# Altium PCB CellVoltageControl.PcbDoc (part 3 of 3)
Units mm, origin at the board's own origin, x right, y up, seen from the top; angles counter-clockwise.
Board outline 100.01 x 50.02 mm, 2 copper layers (Top Layer, Bottom Layer); 240 components, 246 nets, 730 pads, 332 vias.
Unrouted connection lines stored in the file: 5.
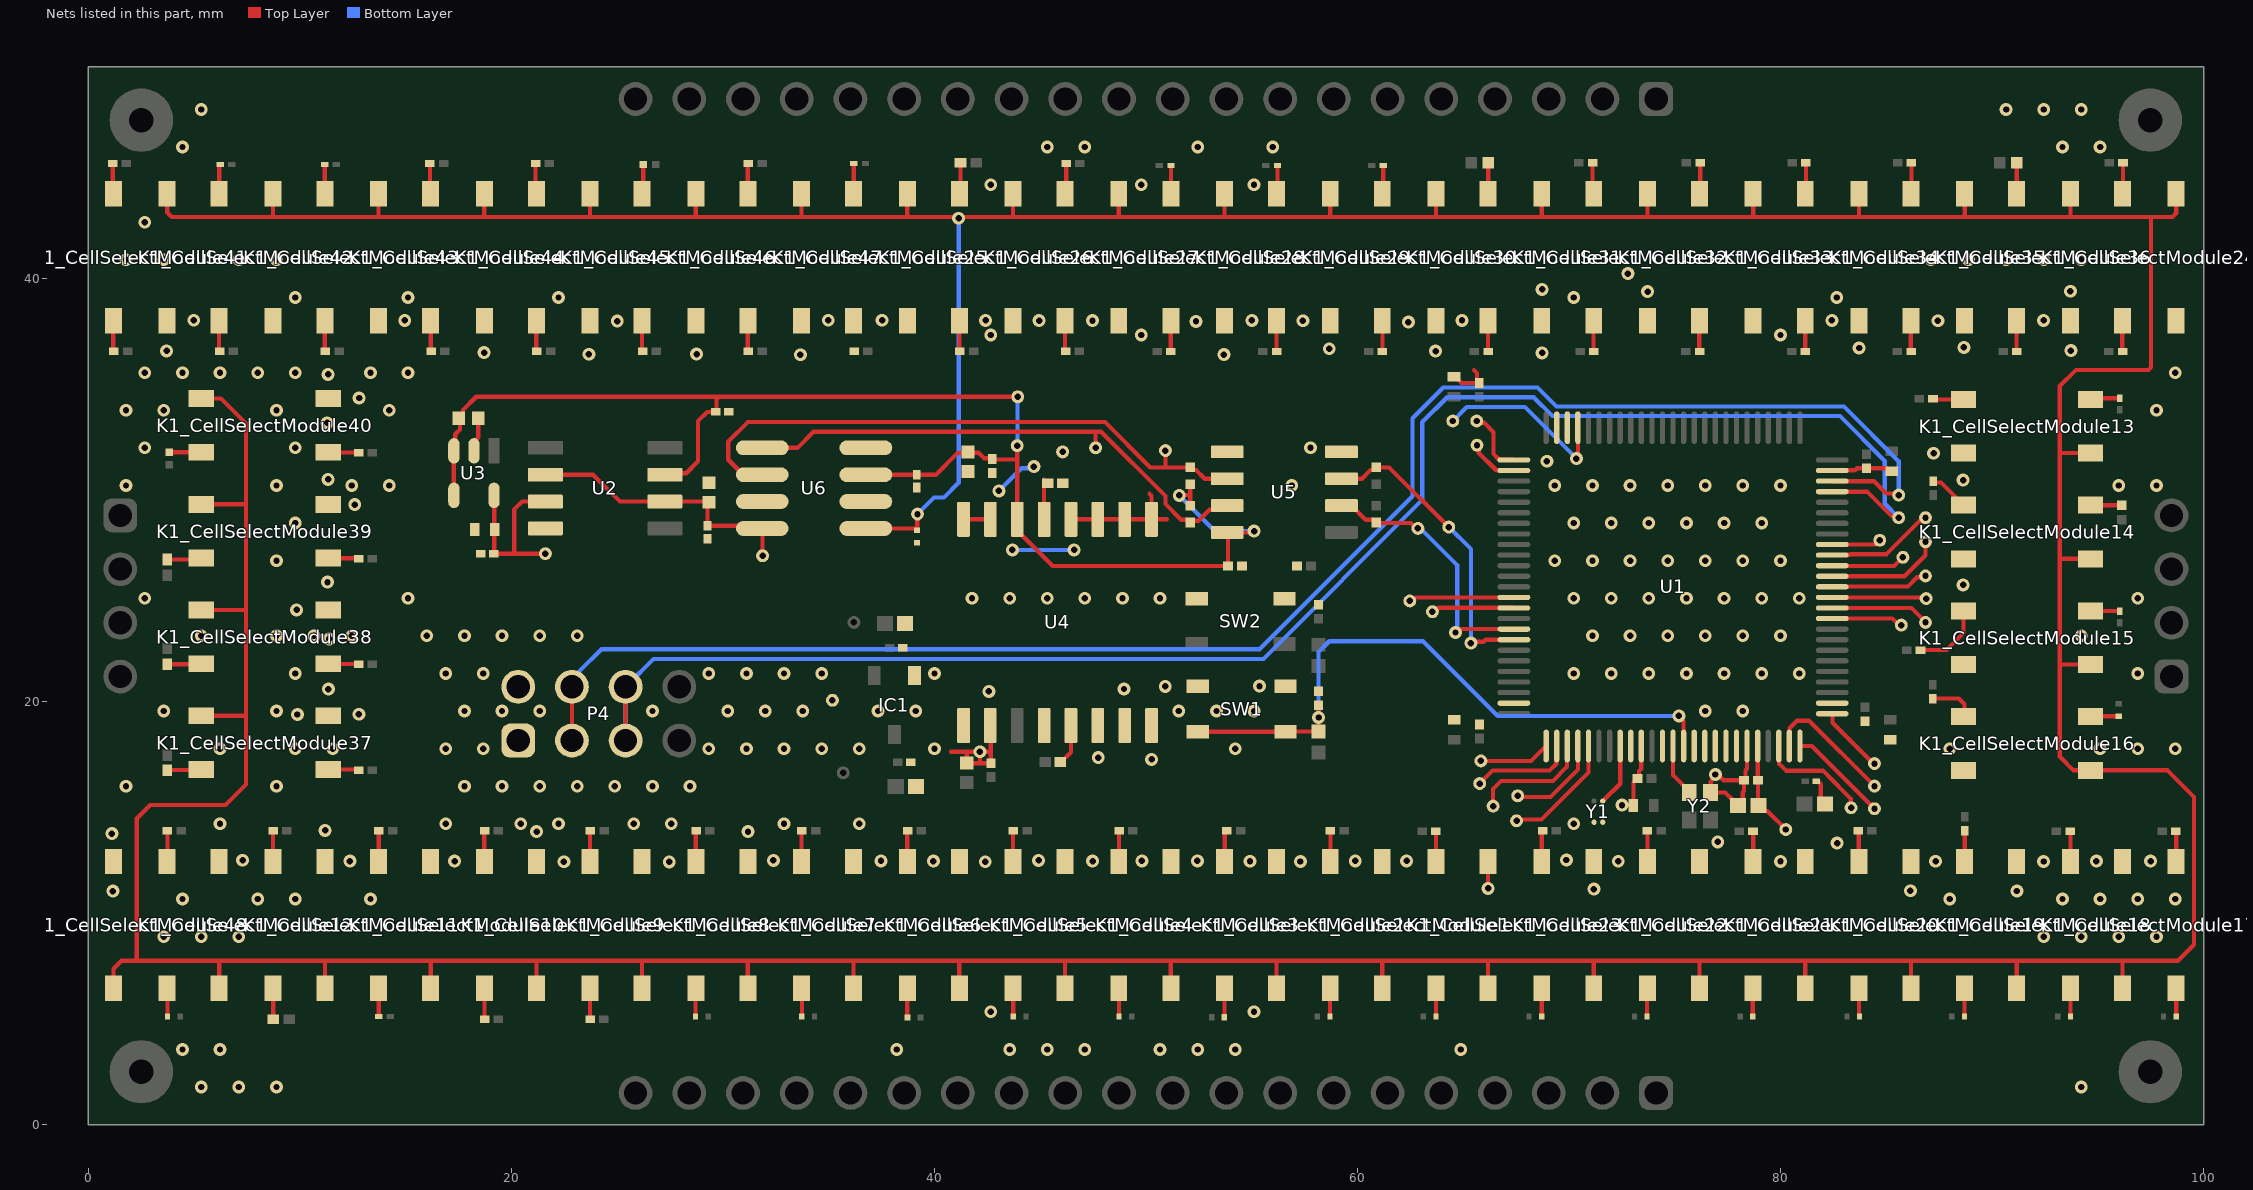
[diagram p3: the nets of this part, all layers, seen from the top]

## Via types
v1: diameter 0.6, hole 0.3, Top Layer to Bottom Layer, 207 vias
v2: diameter 0.61, hole 0.305, Top Layer to Bottom Layer, tented both sides, 125 vias

## Nets (pads, with @x,y where several pads share a name; then routed paths per layer and width w, separated by ;. In a path a pad name is that pad's centre, name@x,y a point inside that pad or via, vN(x,y) a via of type N, cw(c..) or ccw(c..) an arc to the next point about the centre after c; other vN are vias at no path point) (continued)
GND: C1.2 C2.1 C3.2 C4.1 C5.2 C6.1 C7.2 C8.1 C9.2 C10.1 C11.2 C12.2 C13.2 C14.2 C15.2 C16.2 C23.2 C24.2 C25.2 C26.2 C27.1 C28.1 C31.2 IC1.1 J38.1 K1_CellSelectModule1.2 K1_CellSelectModule2.2 K1_CellSelectModule3.2 K1_CellSelectModule4.2 K1_CellSelectModule5.2 K1_CellSelectModule6.2 K1_CellSelectModule7.2 K1_CellSelectModule8.2 K1_CellSelectModule9.2 K1_CellSelectModule10.2 K1_CellSelectModule11.2 K1_CellSelectModule12.2 K1_CellSelectModule13.2 K1_CellSelectModule14.2 K1_CellSelectModule15.2 K1_CellSelectModule16.2 K1_CellSelectModule17.2 K1_CellSelectModule18.2 K1_CellSelectModule19.2 K1_CellSelectModule20.2 K1_CellSelectModule21.2 K1_CellSelectModule22.2 K1_CellSelectModule23.2 K1_CellSelectModule24.2 K1_CellSelectModule25.2 K1_CellSelectModule26.2 K1_CellSelectModule27.2 K1_CellSelectModule28.2 K1_CellSelectModule29.2 K1_CellSelectModule30.2 K1_CellSelectModule31.2 K1_CellSelectModule32.2 K1_CellSelectModule33.2 K1_CellSelectModule34.2 K1_CellSelectModule35.2 K1_CellSelectModule36.2 K1_CellSelectModule37.2 K1_CellSelectModule38.2 K1_CellSelectModule39.2 K1_CellSelectModule40.2 K1_CellSelectModule41.2 K1_CellSelectModule42.2 K1_CellSelectModule43.2 K1_CellSelectModule44.2 K1_CellSelectModule45.2 K1_CellSelectModule46.2 K1_CellSelectModule47.2 K1_CellSelectModule48.2 P4.1 P4.2 SW1.1 SW1.2 SW2.1 SW2.2 U1.10 U1.19 U1.20 U1.27 U1.49 U1.74 U1.99 U4.2 U4.6 U4.7 U4.8 U5.4 Y1.1 Y1.4 Y2.2 | length 23.9
  Top Layer w0.2: 40.783,17.634 v2(42.152,17.634) ; 41.529,17.572 C27.1@41.529,17.097 41.532,17.094 42.102,17.094 ; v2@42.073,17.555 v2(42.152,17.634) ; U4.2@42.649,18.874 42.661,18.863 42.661,17.653 ; C2.1@64.567,35.364 64.642,35.364 64.932,35.074 C1.2@65.765,35.074 65.655,35.184 65.655,35.536 65.514,35.677 ; K1_CellSelectModule23.2@66.18,12.444 66.181,12.443 v2(66.181,11.171) ; v2(72.517,15.113) 73.037,15.113 C4.1@73.058,15.092 73.058,16.196 73.23,16.368 C3.2@73.25,16.368 73.326,16.444 73.326,16.728 73.43,16.832 U1.10@73.43,17.907 ; Y2.2@76.7,15.706 77.394,15.706 77.73,15.37 77.73,15.346 77.986,15.09 C14.2@78.01,15.09 78.228,15.309 78.228,15.721 78.283,15.775 C13.2@78.283,16.285 ; Y2.2@76.708,15.714 76.708,16.224 76.931,16.447 v2(76.931,16.558) 77.042,16.558 77.315,16.285 C13.2@78.283,16.285 ; U1.20@78.43,17.907 78.43,16.832 78.359,16.761 78.359,16.361 C13.2@78.283,16.285 ; C15.2@81.777,16.256 81.777,16.216 81.798,16.216 81.915,16.099 81.915,15.363 C16.2@82.106,15.172 ; U1.49@82.455,30.932 82.465,30.942 83.527,30.942 83.624,31.039 C7.2@84.074,31.039 85.051,31.039 85.196,30.894 C6.1@85.271,30.894 ; 42.102,17.094 C28.1@42.672,17.094 42.661,17.105 42.661,17.653 ; 42.102,17.094 42.152,17.144 v2(42.152,17.634) ; v2(42.152,17.634) 42.641,17.634 42.661,17.653
  other v1: 5.334,1.778 7.112,1.778 8.89,1.778 94.234,1.778 4.445,3.556 6.223,3.556 38.227,3.556 43.561,3.556 45.339,3.556 47.117,3.556 50.673,3.556 52.451,3.556 54.229,3.556 64.897,3.556 42.672,5.334 55.118,5.334 3.556,8.89 5.334,8.89 7.112,8.89 92.456,8.89 94.234,8.89 96.012,8.89 97.79,8.89 4.445,10.668 8.001,10.668 9.779,10.668 13.335,10.668 88.011,10.668 93.345,10.668 95.123,10.668 96.901,10.668 98.679,10.668 6.223,14.224 16.891,14.224 20.447,14.224 22.225,14.224 25.781,14.224 27.559,14.224 32.893,14.224 36.449,14.224 70.231,14.224 1.778,16.002 8.89,16.002 17.78,16.002 19.558,16.002 21.336,16.002 23.114,16.002 24.892,16.002 26.67,16.002 28.448,16.002 6.223,17.78 9.779,17.78 11.557,17.78 16.891,17.78 18.669,17.78 29.337,17.78 31.115,17.78 32.893,17.78 34.671,17.78 36.449,17.78 40.005,17.78 54.229,17.78 88.011,17.78 95.123,17.78 96.901,17.78 98.679,17.78 3.556,19.558 8.89,19.558 17.78,19.558 19.558,19.558 21.336,19.558 26.67,19.558 30.226,19.558 32.004,19.558 33.782,19.558 37.338,19.558 39.116,19.558 51.562,19.558 53.34,19.558 55.118,19.558 76.454,19.558 78.232,19.558 9.779,21.336 16.891,21.336 18.669,21.336 29.337,21.336 31.115,21.336 32.893,21.336 34.671,21.336 40.005,21.336 70.231,21.336 72.009,21.336 73.787,21.336 75.565,21.336 77.343,21.336 79.121,21.336 80.899,21.336 96.901,21.336 5.334,23.114 8.89,23.114 10.668,23.114 12.446,23.114 16.002,23.114 17.78,23.114 19.558,23.114 21.336,23.114 23.114,23.114 71.12,23.114 72.898,23.114 74.676,23.114 76.454,23.114 78.232,23.114 80.01,23.114 94.234,23.114 2.667,24.892 15.113,24.892 41.783,24.892 43.561,24.892 45.339,24.892 47.117,24.892 48.895,24.892 50.673,24.892 70.231,24.892 72.009,24.892 73.787,24.892 75.565,24.892 77.343,24.892 79.121,24.892 80.899,24.892 96.901,24.892 8.89,26.67 69.342,26.67 71.12,26.67 72.898,26.67 74.676,26.67 76.454,26.67 78.232,26.67 80.01,26.67 9.779,28.448 70.231,28.448 72.009,28.448 73.787,28.448 75.565,28.448 77.343,28.448 79.121,28.448 1.778,30.226 8.89,30.226 12.446,30.226 14.224,30.226 56.896,30.226 69.342,30.226 71.12,30.226 72.898,30.226 74.676,30.226 76.454,30.226 78.232,30.226 80.01,30.226 96.012,30.226 97.79,30.226 2.667,32.004 9.779,32.004 57.785,32.004 1.778,33.782 3.556,33.782 8.89,33.782 14.224,33.782 97.79,33.782 2.667,35.56 4.445,35.56 6.223,35.56 8.001,35.56 9.779,35.56 13.335,35.56 15.113,35.56 98.679,35.56 42.672,37.338 49.784,37.338 80.01,37.338 9.779,39.116 15.113,39.116 22.225,39.116 70.231,39.116 82.677,39.116 1.778,40.894 3.556,40.894 7.112,40.894 8.89,40.894 87.122,40.894 88.9,40.894 90.678,40.894 92.456,40.894 94.234,40.894 2.667,42.672 42.672,44.45 49.784,44.45 55.118,44.45 4.445,46.228 45.339,46.228 47.117,46.228 52.451,46.228 56.007,46.228 93.345,46.228 95.123,46.228 5.334,48.006 90.678,48.006 92.456,48.006 94.234,48.006
  other v2: 1.151,11.04 86.152,11.06 91.186,11.049 71.189,11.141 22.484,12.433 27.462,12.423 42.404,12.433 54.924,12.453 57.307,12.443 72.34,12.453 80.01,12.446 87.343,12.453 92.452,12.443 12.358,12.464 17.315,12.464 37.477,12.474 39.951,12.464 47.483,12.464 49.815,12.474 52.44,12.474 59.901,12.474 62.335,12.474 94.946,12.464 97.511,12.464 7.289,12.504 32.389,12.494 44.929,12.494 69.887,12.514 82.684,13.31 77.045,13.371 1.11,13.766 21.192,13.857 31.187,13.857 11.186,13.917 50.269,17.271 47.748,17.355 9.881,19.396 12.786,19.406 42.579,20.485 11.344,20.595 48.967,20.601 50.919,20.727 55.375,20.737 11.386,22.974 9.839,24.342 88.646,25.527 11.303,25.654 12.592,29.32 88.646,30.48 11.334,30.509 68.961,31.369 87.249,31.75 11.281,33.182 12.797,34.361 11.334,35.477 33.667,36.408 23.659,36.429 53.693,36.411 28.755,36.439 18.706,36.51 68.734,36.494 63.703,36.578 3.695,36.592 93.74,36.599 58.672,36.692 83.728,36.725 88.681,36.756 62.414,37.95 52.373,37.981 25.004,37.998 14.956,38.029 42.425,38.033 44.951,38.023 47.477,38.023 55.013,38.033 57.425,38.012 64.951,38.033 82.44,38.034 87.449,38.014 92.456,38.031 4.979,38.039 34.982,38.039 37.529,38.039 73.728,39.393 93.723,39.411 68.734,39.499 72.794,40.24
HSE: U1.13 Y2.3 | length 2.5
  Top Layer w0.2: U1.13@74.93,17.907 74.93,16.526 75.7,15.756 Y2.3@75.7,15.706
ISO_5V: C17.1 C18.1 C29.1 C30.1 C32.1 C33.1 J35.1 J43.1 R56.1 R58.1 U2.7 U3.3 U3.4 U4.14 U5.8 U6.3 | length 69.6
  Top Layer w0.2: U3.4@17.278,29.758 U3.3@17.278,31.859 17.342,31.923 17.342,32.645 17.575,32.878 17.575,33.401 17.711,33.537 17.711,33.792 18.337,34.417 29.822,34.417 ; U2.7@27.256,30.734 27.327,30.804 28.264,30.804 28.829,31.369 28.829,33.274 29.258,33.703 29.661,33.703 29.695,33.737 29.695,34.29 29.822,34.417 ; U6.3@36.76,30.734 40.069,30.734 41.1,31.765 41.552,31.765 C30.1@41.593,31.806 41.627,31.773 42.086,31.773 42.343,31.515 42.697,31.515 42.754,31.459 43.914,31.459 ; J35.1@43.914,32.107 43.914,30.007 43.919,30.001 U4.14@43.919,28.624 43.919,28.099 45.599,26.42 C32.1@53.882,26.42 53.882,27.971 U5.8@53.849,28.004 55.055,28.004 v2(55.118,28.067) ; J43.1@43.942,34.417 29.822,34.417 ; v2(51.581,29.759) 51.599,29.776 52.104,29.776 ; R56.1@52.104,29.274 52.104,29.776 ; R58.1@52.104,30.278 52.104,29.776
  Bottom Layer w0.2: J35.1@43.914,32.107 43.928,32.121 43.928,34.403 J43.1@43.942,34.417 ; v2(51.581,29.759) 51.581,29.743 53.257,28.067 v2(55.118,28.067)
ISO_GND: C17.2 C18.2 C19.1 C20.1 C21.2 C22.2 C29.2 C30.2 C32.2 C33.2 J39.1 R50.1 R53.2 U2.4 U3.2 U4.9 U4.10 U4.11 U4.12 U4.15 U4.16 U5.5 U6.7 | length 13.7
  Top Layer w0.2: U3.2@18.228,31.859 18.228,32.286 18.431,32.489 C18.2@18.431,33.401 ; U4.16@41.379,28.624 U4.15@42.649,28.624 ; U4.12@46.459,28.624 U4.11@47.729,28.624 U4.10@48.999,28.624 U4.9@50.269,28.624 ; 50.175,29.828 50.269,29.733 U4.9@50.269,28.624 ; 51.006,28.624 U4.9@50.269,28.624
  Bottom Layer w0.2: v2(43.053,29.972) 44.118,31.037 44.626,31.037 v2(44.704,31.115) ; v2(43.688,27.178) v2(46.609,27.178)
ISO_SCL: J24.1 R58.2 U5.6 U6.6 | length 28.6
  Top Layer w0.2: U6.6@31.86,30.734 30.96,30.734 30.256,31.438 30.256,32.296 31.18,33.22 48.067,33.22 50.209,31.078 50.927,31.078 ; J24.1@50.927,31.877 50.927,31.078 ; U5.6@53.849,30.544 52.789,30.544 52.379,30.953 52.229,30.953 R58.2@52.104,31.078 50.927,31.078
ISO_SDA: J21.1 R56.2 U5.7 U6.5 | length 25.4
  Top Layer w0.2: U6.5@31.86,32.004 33.528,32.004 34.29,32.766 47.625,32.766 ; J21.1@47.625,32.004 47.625,32.766 ; U5.7@53.849,29.274 53.649,29.074 53.008,29.074 52.493,28.559 52.189,28.559 R56.2@52.104,28.474 51.979,28.599 51.673,28.599 50.923,29.348 50.923,29.722 47.879,32.766 47.625,32.766
LSE_RTC: U1.8 Y1.2 | length 2.8
  Top Layer w0.2: Y1.2@71.694,15.384 72.43,16.12 U1.8@72.43,17.907
NetC19_2: C19.2 C21.1 J44.1 U2.3 U3.5 | length 8.9
  Top Layer w0.2: U3.5@19.178,29.758 19.193,29.743 19.193,28.158 C19.2@19.208,28.143 19.186,28.121 19.186,27.021 C21.1@19.165,27 19.431,27 19.698,27 20.13,27 ; J44.1@21.606,27 20.13,27 ; U2.3@21.606,29.464 20.511,29.464 20.13,29.083 20.13,27
NetC20_2: C20.2 C22.1 J42.1 U2.2 U2.6 U6.8 | length 13
  Top Layer w0.2: U2.2@21.858,30.734 23.862,30.734 25.132,29.464 U2.6@27.256,29.464 29.309,29.464 C20.2@29.346,29.427 29.274,29.356 C22.1@29.274,28.321 30.698,28.321 30.825,28.194 U6.8@31.86,28.194 31.877,28.177 J42.1@31.877,27
NetK1_CellSelectModule1_1: K1_CellSelectModule1.1 R1_CellSelectModule1.2 | length 1.4
  Top Layer w0.2: K1_CellSelectModule1.1@63.714,12.439 R1_CellSelectModule1.2@63.714,13.887
NetK1_CellSelectModule1_4: K1_CellSelectModule1.4 R3.1 | length 1.3
  Top Layer w0.2: R3.1@63.718,5.111 63.718,6.442 K1_CellSelectModule1.4@63.72,6.444
NetK1_CellSelectModule2_1: K1_CellSelectModule2.1 R1_CellSelectModule2.2 | length 1.4
  Top Layer w0.2: K1_CellSelectModule2.1@58.726,12.45 R1_CellSelectModule2.2@58.726,13.899
NetK1_CellSelectModule2_4: K1_CellSelectModule2.4 R46.1 | length 1.3
  Top Layer w0.2: R46.1@58.712,5.111 58.712,6.436 K1_CellSelectModule2.4@58.72,6.444
NetK1_CellSelectModule3_1: K1_CellSelectModule3.1 R1_CellSelectModule3.2 | length 1.4
  Top Layer w0.2: K1_CellSelectModule3.1@53.726,12.45 R1_CellSelectModule3.2@53.726,13.899
NetK1_CellSelectModule3_4: K1_CellSelectModule3.4 R42.1 | length 1.3
  Top Layer w0.2: R42.1@53.72,5.152 K1_CellSelectModule3.4@53.72,6.444
NetK1_CellSelectModule4_1: K1_CellSelectModule4.1 R1_CellSelectModule4.2 | length 1.4
  Top Layer w0.2: K1_CellSelectModule4.1@48.726,12.45 R1_CellSelectModule4.2@48.726,13.899
NetK1_CellSelectModule4_4: K1_CellSelectModule4.4 R38.1 | length 1.3
  Top Layer w0.2: K1_CellSelectModule4.4@48.72,6.444 48.735,6.429 R38.1@48.735,5.111
NetK1_CellSelectModule5_1: K1_CellSelectModule5.1 R1_CellSelectModule5.2 | length 1.4
  Top Layer w0.2: K1_CellSelectModule5.1@43.72,12.444 R1_CellSelectModule5.2@43.72,13.893
NetK1_CellSelectModule5_4: K1_CellSelectModule5.4 R34.1 | length 1.3
  Top Layer w0.2: K1_CellSelectModule5.4@43.72,6.444 43.735,6.429 R34.1@43.735,5.111
NetK1_CellSelectModule6_1: K1_CellSelectModule6.1 R1_CellSelectModule6.2 | length 1.4
  Top Layer w0.2: K1_CellSelectModule6.1@38.72,12.444 R1_CellSelectModule6.2@38.72,13.893
NetK1_CellSelectModule6_4: K1_CellSelectModule6.4 R30.1 | length 1.4
  Top Layer w0.2: K1_CellSelectModule6.4@38.72,6.444 38.722,6.442 R30.1@38.722,5.065
NetK1_CellSelectModule7_1: K1_CellSelectModule7.1 R1_CellSelectModule7.2 | length 1.4
  Top Layer w0.2: K1_CellSelectModule7.1@33.72,12.444 R1_CellSelectModule7.2@33.72,13.893
NetK1_CellSelectModule7_4: K1_CellSelectModule7.4 R26.1 | length 1.3
  Top Layer w0.2: K1_CellSelectModule7.4@33.72,6.444 33.735,6.429 R26.1@33.735,5.111
NetK1_CellSelectModule8_1: K1_CellSelectModule8.1 R1_CellSelectModule8.2 | length 1.4
  Top Layer w0.2: K1_CellSelectModule8.1@28.72,12.444 R1_CellSelectModule8.2@28.72,13.893
NetK1_CellSelectModule8_4: K1_CellSelectModule8.4 R22.1 | length 1.3
  Top Layer w0.2: R22.1@28.702,5.111 28.702,6.426 K1_CellSelectModule8.4@28.72,6.444
NetK1_CellSelectModule9_1: K1_CellSelectModule9.1 R1_CellSelectModule9.2 | length 1.4
  Top Layer w0.2: K1_CellSelectModule9.1@23.72,12.444 R1_CellSelectModule9.2@23.72,13.893
NetK1_CellSelectModule9_4: K1_CellSelectModule9.4 R18.1 | length 1.5
  Top Layer w0.2: K1_CellSelectModule9.4@23.72,6.444 23.722,6.442 R18.1@23.722,4.984
NetK1_CellSelectModule10_1: K1_CellSelectModule10.1 R1_CellSelectModule10.2 | length 1.4
  Top Layer w0.2: K1_CellSelectModule10.1@18.72,12.444 R1_CellSelectModule10.2@18.72,13.893
NetK1_CellSelectModule10_4: K1_CellSelectModule10.4 R14.1 | length 1.5
  Top Layer w0.2: K1_CellSelectModule10.4@18.72,6.444 18.732,6.433 R14.1@18.732,4.984
NetK1_CellSelectModule11_1: K1_CellSelectModule11.1 R1_CellSelectModule11.2 | length 1.5
  Top Layer w0.2: K1_CellSelectModule11.1@13.72,12.444 13.732,12.456 R1_CellSelectModule11.2@13.732,13.905
NetK1_CellSelectModule11_4: K1_CellSelectModule11.4 R10.1 | length 1.3
  Top Layer w0.2: K1_CellSelectModule11.4@13.72,6.444 13.729,6.435 R10.1@13.729,5.111
NetK1_CellSelectModule12_1: K1_CellSelectModule12.1 R1_CellSelectModule12.2 | length 1.5
  Top Layer w0.2: K1_CellSelectModule12.1@8.72,12.444 8.732,12.456 R1_CellSelectModule12.2@8.732,13.905
NetK1_CellSelectModule12_4: K1_CellSelectModule12.4 R6.1 | length 1.5
  Top Layer w0.2: K1_CellSelectModule12.4@8.72,6.444 8.738,6.426 R6.1@8.738,4.984
NetK1_CellSelectModule13_1: K1_CellSelectModule13.1 R1_CellSelectModule13.2 | length 1.4
  Top Layer w0.2: R1_CellSelectModule13.2@87.225,34.289 K1_CellSelectModule13.1@88.673,34.289
NetK1_CellSelectModule13_4: K1_CellSelectModule13.4 R47.1 | length 1.4
  Top Layer w0.2: K1_CellSelectModule13.4@94.667,34.295 94.721,34.348 R47.1@96.059,34.348
NetK1_CellSelectModule14_1: K1_CellSelectModule14.1 R1_CellSelectModule14.2 | length 1.9
  Top Layer w0.2: R1_CellSelectModule14.2@87.238,30.424 87.296,30.366 87.596,30.366 K1_CellSelectModule14.1@88.667,29.295
NetK1_CellSelectModule14_4: K1_CellSelectModule14.4 R43.1 | length 1.5
  Top Layer w0.2: K1_CellSelectModule14.4@94.667,29.295 K1_CellSelectModule14.4@94.667,29.295 R43.1@96.159,29.294
NetK1_CellSelectModule15_1: K1_CellSelectModule15.1 R1_CellSelectModule15.2 | length 3.4
  Top Layer w0.2: R1_CellSelectModule15.2@86.622,22.446 87.858,22.446 88.667,23.255 K1_CellSelectModule15.1@88.667,24.295
NetK1_CellSelectModule15_4: K1_CellSelectModule15.4 R39.1 | length 1.3
  Top Layer w0.2: K1_CellSelectModule15.4@94.667,24.295 94.67,24.292 R39.1@96.013,24.292
NetK1_CellSelectModule16_1: K1_CellSelectModule16.1 R1_CellSelectModule16.2 | length 2.2
  Top Layer w0.2: R1_CellSelectModule16.2@87.207,20.148 88.437,20.148 88.708,19.877 88.708,19.335 K1_CellSelectModule16.1@88.667,19.295
NetK1_CellSelectModule16_4: K1_CellSelectModule16.4 R35.1 | length 1.4
  Top Layer w0.2: K1_CellSelectModule16.4@94.667,19.295 94.682,19.31 R35.1@96.013,19.31
NetK1_CellSelectModule17_1: K1_CellSelectModule17.1 R1_CellSelectModule17.2 | length 1.4
  Top Layer w0.2: K1_CellSelectModule17.1@98.726,12.45 R1_CellSelectModule17.2@98.726,13.899
NetK1_CellSelectModule17_4: K1_CellSelectModule17.4 R31.1 | length 1.3
  Top Layer w0.2: K1_CellSelectModule17.4@98.72,6.444 98.724,6.44 R31.1@98.724,5.111
NetK1_CellSelectModule18_1: K1_CellSelectModule18.1 R1_CellSelectModule18.2 | length 1.4
  Top Layer w0.2: K1_CellSelectModule18.1@93.726,12.45 R1_CellSelectModule18.2@93.726,13.899
NetK1_CellSelectModule18_4: K1_CellSelectModule18.4 R27.1 | length 1.3
  Top Layer w0.2: K1_CellSelectModule18.4@93.72,6.444 93.724,6.44 R27.1@93.724,5.111
NetK1_CellSelectModule19_1: K1_CellSelectModule19.1 R1_CellSelectModule19.2 | length 1.4
  Top Layer w0.2: K1_CellSelectModule19.1@88.726,12.45 R1_CellSelectModule19.2@88.726,13.899
NetK1_CellSelectModule19_4: K1_CellSelectModule19.4 R23.1 | length 1.3
  Top Layer w0.2: R23.1@88.714,5.111 88.714,6.438 K1_CellSelectModule19.4@88.72,6.444
NetK1_CellSelectModule20_1: K1_CellSelectModule20.1 R1_CellSelectModule20.2 | length 1.4
  Top Layer w0.2: K1_CellSelectModule20.1@83.714,12.439 R1_CellSelectModule20.2@83.714,13.887
NetK1_CellSelectModule20_4: K1_CellSelectModule20.4 R19.1 | length 1.3
  Top Layer w0.2: K1_CellSelectModule20.4@83.72,6.444 83.72,5.167 83.751,5.136 R19.1@83.75,5.111
NetK1_CellSelectModule21_1: K1_CellSelectModule21.1 R1_CellSelectModule21.2 | length 1.4
  Top Layer w0.2: K1_CellSelectModule21.1@78.726,12.45 R1_CellSelectModule21.2@78.726,13.899
NetK1_CellSelectModule21_4: K1_CellSelectModule21.4 R15.1 | length 1.3
  Top Layer w0.2: R15.1@78.702,5.111 78.702,6.426 K1_CellSelectModule21.4@78.72,6.444
NetK1_CellSelectModule22_1: K1_CellSelectModule22.1 R1_CellSelectModule22.2 | length 1.4
  Top Layer w0.2: K1_CellSelectModule22.1@73.726,12.45 R1_CellSelectModule22.2@73.726,13.899
NetK1_CellSelectModule22_4: K1_CellSelectModule22.4 R11.1 | length 1.3
  Top Layer w0.2: R11.1@73.703,5.111 73.703,6.427 K1_CellSelectModule22.4@73.72,6.444
NetK1_CellSelectModule23_1: K1_CellSelectModule23.1 R1_CellSelectModule23.2 | length 1.4
  Top Layer w0.2: K1_CellSelectModule23.1@68.726,12.45 R1_CellSelectModule23.2@68.726,13.899
NetK1_CellSelectModule23_4: K1_CellSelectModule23.4 R7.1 | length 1.3
  Top Layer w0.2: K1_CellSelectModule23.4@68.72,6.444 68.723,6.442 R7.1@68.723,5.111
NetK1_CellSelectModule24_1: K1_CellSelectModule24.1 R1_CellSelectModule24.2 | length 1.4
  Top Layer w0.2: R1_CellSelectModule24.2@96.174,36.567 K1_CellSelectModule24.1@96.174,38.015
NetK1_CellSelectModule24_4: K1_CellSelectModule24.4 R4.1 | length 1.5
  Top Layer w0.2: K1_CellSelectModule24.4@96.18,44.021 96.207,44.048 R4.1@96.207,45.481
NetK1_CellSelectModule25_1: K1_CellSelectModule25.1 R1_CellSelectModule25.2
NetK1_CellSelectModule25_4: K1_CellSelectModule25.4 R5.1 | length 1.4
  Top Layer w0.2: K1_CellSelectModule25.4@36.18,44.021 36.191,44.032 R5.1@36.191,45.446
NetK1_CellSelectModule26_1: K1_CellSelectModule26.1 R1_CellSelectModule26.2 | length 1.4
  Top Layer w0.2: R1_CellSelectModule26.2@41.186,36.578 K1_CellSelectModule26.1@41.186,38.027
NetK1_CellSelectModule26_4: K1_CellSelectModule26.4 R48.1 | length 1.5
  Top Layer w0.2: K1_CellSelectModule26.4@41.18,44.021 41.234,44.075 R48.1@41.234,45.481
NetK1_CellSelectModule27_1: K1_CellSelectModule27.1 R1_CellSelectModule27.2 | length 1.4
  Top Layer w0.2: R1_CellSelectModule27.2@46.174,36.567 K1_CellSelectModule27.1@46.174,38.015
NetK1_CellSelectModule27_4: K1_CellSelectModule27.4 R44.1 | length 1.5
  Top Layer w0.2: K1_CellSelectModule27.4@46.18,44.021 46.233,44.074 R44.1@46.233,45.45
NetK1_CellSelectModule28_1: K1_CellSelectModule28.1 R1_CellSelectModule28.2 | length 1.4
  Top Layer w0.2: R1_CellSelectModule28.2@51.174,36.567 K1_CellSelectModule28.1@51.174,38.015
NetK1_CellSelectModule28_4: K1_CellSelectModule28.4 R40.1 | length 1.3
  Top Layer w0.2: K1_CellSelectModule28.4@51.18,44.021 51.189,44.03 R40.1@51.189,45.354
NetK1_CellSelectModule29_1: K1_CellSelectModule29.1 R1_CellSelectModule29.2 | length 1.4
  Top Layer w0.2: R1_CellSelectModule29.2@56.174,36.567 K1_CellSelectModule29.1@56.174,38.015
NetK1_CellSelectModule29_4: K1_CellSelectModule29.4 R36.1 | length 1.4
  Top Layer w0.2: K1_CellSelectModule29.4@56.18,44.021 56.225,44.066 R36.1@56.225,45.354
NetK1_CellSelectModule30_1: K1_CellSelectModule30.1 R1_CellSelectModule30.2 | length 1.4
  Top Layer w0.2: R1_CellSelectModule30.2@61.186,36.578 K1_CellSelectModule30.1@61.186,38.027
NetK1_CellSelectModule30_4: K1_CellSelectModule30.4 R32.1 | length 1.4
  Top Layer w0.2: K1_CellSelectModule30.4@61.18,44.021 61.225,44.066 R32.1@61.225,45.354
NetK1_CellSelectModule31_1: K1_CellSelectModule31.1 R1_CellSelectModule31.2 | length 1.4
  Top Layer w0.2: R1_CellSelectModule31.2@66.174,36.567 K1_CellSelectModule31.1@66.174,38.015
NetK1_CellSelectModule31_4: K1_CellSelectModule31.4 R28.1 | length 1.5
  Top Layer w0.2: K1_CellSelectModule31.4@66.18,44.021 66.187,44.028 R28.1@66.187,45.481
NetK1_CellSelectModule32_1: K1_CellSelectModule32.1 R1_CellSelectModule32.2 | length 1.4
  Top Layer w0.2: R1_CellSelectModule32.2@71.174,36.567 K1_CellSelectModule32.1@71.174,38.015
NetK1_CellSelectModule32_4: K1_CellSelectModule32.4 R24.1 | length 1.5
  Top Layer w0.2: R24.1@71.125,45.481 71.125,44.076 K1_CellSelectModule32.4@71.18,44.021
NetK1_CellSelectModule33_1: K1_CellSelectModule33.1 R1_CellSelectModule33.2 | length 1.4
  Top Layer w0.2: R1_CellSelectModule33.2@76.174,36.567 K1_CellSelectModule33.1@76.174,38.015
NetK1_CellSelectModule33_4: K1_CellSelectModule33.4 R20.1 | length 1.5
  Top Layer w0.2: K1_CellSelectModule33.4@76.18,44.021 76.214,44.055 R20.1@76.213,45.481
NetK1_CellSelectModule34_1: K1_CellSelectModule34.1 R1_CellSelectModule34.2 | length 1.4
  Top Layer w0.2: R1_CellSelectModule34.2@81.186,36.578 K1_CellSelectModule34.1@81.186,38.027
NetK1_CellSelectModule34_4: K1_CellSelectModule34.4 R16.1 | length 1.5
  Top Layer w0.2: K1_CellSelectModule34.4@81.18,44.021 81.215,44.056 R16.1@81.215,45.481
NetK1_CellSelectModule35_1: K1_CellSelectModule35.1 R1_CellSelectModule35.2 | length 1.4
  Top Layer w0.2: R1_CellSelectModule35.2@86.174,36.567 K1_CellSelectModule35.1@86.174,38.015
NetK1_CellSelectModule35_4: K1_CellSelectModule35.4 R12.1 | length 1.5
  Top Layer w0.2: K1_CellSelectModule35.4@86.18,44.021 86.204,44.045 R12.1@86.204,45.481
NetK1_CellSelectModule36_1: K1_CellSelectModule36.1 R1_CellSelectModule36.2 | length 1.4
  Top Layer w0.2: R1_CellSelectModule36.2@91.174,36.567 K1_CellSelectModule36.1@91.174,38.015
NetK1_CellSelectModule36_4: K1_CellSelectModule36.4 R8.1 | length 1.5
  Top Layer w0.2: K1_CellSelectModule36.4@91.18,44.021 91.187,44.028 R8.1@91.187,45.481
NetK1_CellSelectModule37_1: K1_CellSelectModule37.1 R1_CellSelectModule37.2 | length 1.4
  Top Layer w0.2: K1_CellSelectModule37.1@11.329,16.8 R1_CellSelectModule37.2@12.777,16.8
NetK1_CellSelectModule37_4: K1_CellSelectModule37.4 R49.1 | length 1.6
  Top Layer w0.2: R49.1@3.73,16.764 5.305,16.764 K1_CellSelectModule37.4@5.335,16.794
NetK1_CellSelectModule38_1: K1_CellSelectModule38.1 R1_CellSelectModule38.2 | length 1.4
  Top Layer w0.2: K1_CellSelectModule38.1@11.34,21.788 R1_CellSelectModule38.2@12.789,21.788
NetK1_CellSelectModule38_4: K1_CellSelectModule38.4 R45.1 | length 1.6
  Top Layer w0.2: R45.1@3.73,21.77 5.311,21.77 K1_CellSelectModule38.4@5.335,21.794
NetK1_CellSelectModule39_1: K1_CellSelectModule39.1 R1_CellSelectModule39.2 | length 1.4
  Top Layer w0.2: K1_CellSelectModule39.1@11.34,26.788 R1_CellSelectModule39.2@12.789,26.788
NetK1_CellSelectModule39_4: K1_CellSelectModule39.4 R41.1 | length 1.6
  Top Layer w0.2: R41.1@3.73,26.727 5.268,26.727 K1_CellSelectModule39.4@5.335,26.794
NetK1_CellSelectModule40_1: K1_CellSelectModule40.1 R1_CellSelectModule40.2 | length 1.4
  Top Layer w0.2: K1_CellSelectModule40.1@11.34,31.788 R1_CellSelectModule40.2@12.789,31.788
NetK1_CellSelectModule40_4: K1_CellSelectModule40.4 R37.1 | length 1.5
  Top Layer w0.2: R37.1@3.811,31.796 4.145,31.796 4.147,31.794 K1_CellSelectModule40.4@5.335,31.794
NetK1_CellSelectModule41_1: K1_CellSelectModule41.1 R1_CellSelectModule41.2 | length 1.4
  Top Layer w0.2: R1_CellSelectModule41.2@1.174,36.567 K1_CellSelectModule41.1@1.174,38.015
NetK1_CellSelectModule41_4: K1_CellSelectModule41.4 R33.1 | length 1.4
  Top Layer w0.2: R33.1@1.143,45.45 1.143,44.058 K1_CellSelectModule41.4@1.18,44.021
NetK1_CellSelectModule42_1: K1_CellSelectModule42.1 R1_CellSelectModule42.2 | length 1.4
  Top Layer w0.2: R1_CellSelectModule42.2@6.174,36.567 K1_CellSelectModule42.1@6.174,38.015
NetK1_CellSelectModule42_4: K1_CellSelectModule42.4 R29.1 | length 1.4
  Top Layer w0.2: K1_CellSelectModule42.4@6.18,44.021 6.18,45.375 6.205,45.4 R29.1@6.223,45.4
NetK1_CellSelectModule43_1: K1_CellSelectModule43.1 R1_CellSelectModule43.2 | length 1.4
  Top Layer w0.2: R1_CellSelectModule43.2@11.174,36.567 K1_CellSelectModule43.1@11.174,38.015
NetK1_CellSelectModule43_4: K1_CellSelectModule43.4 R25.1 | length 1.4
  Top Layer w0.2: R25.1@11.176,45.4 11.176,44.025 K1_CellSelectModule43.4@11.18,44.021
NetK1_CellSelectModule44_1: K1_CellSelectModule44.1 R1_CellSelectModule44.2 | length 1.4
  Top Layer w0.2: R1_CellSelectModule44.2@16.186,36.578 K1_CellSelectModule44.1@16.186,38.027
NetK1_CellSelectModule44_4: K1_CellSelectModule44.4 R21.1 | length 1.4
  Top Layer w0.2: R21.1@16.144,45.45 16.144,44.057 K1_CellSelectModule44.4@16.18,44.021
NetK1_CellSelectModule45_1: K1_CellSelectModule45.1 R1_CellSelectModule45.2 | length 1.4
  Top Layer w0.2: R1_CellSelectModule45.2@21.174,36.567 K1_CellSelectModule45.1@21.174,38.015
NetK1_CellSelectModule45_4: K1_CellSelectModule45.4 R17.1 | length 1.4
  Top Layer w0.2: R17.1@21.144,45.45 21.144,44.057 K1_CellSelectModule45.4@21.18,44.021
NetK1_CellSelectModule46_1: K1_CellSelectModule46.1 R1_CellSelectModule46.2 | length 1.4
  Top Layer w0.2: R1_CellSelectModule46.2@26.174,36.567 K1_CellSelectModule46.1@26.174,38.015
NetK1_CellSelectModule46_4: K1_CellSelectModule46.4 R13.1 | length 1.4
  Top Layer w0.2: K1_CellSelectModule46.4@26.18,44.021 26.23,44.071 R13.1@26.23,45.4
NetK1_CellSelectModule47_1: K1_CellSelectModule47.1 R1_CellSelectModule47.2 | length 1.4
  Top Layer w0.2: R1_CellSelectModule47.2@31.174,36.567 K1_CellSelectModule47.1@31.174,38.015
NetK1_CellSelectModule47_4: K1_CellSelectModule47.4 R9.1 | length 1.4
  Top Layer w0.2: K1_CellSelectModule47.4@31.18,44.021 31.18,45.42 R9.1@31.21,45.45
NetK1_CellSelectModule48_1: K1_CellSelectModule48.1 R1_CellSelectModule48.2 | length 1.5
  Top Layer w0.2: K1_CellSelectModule48.1@3.72,12.444 3.732,12.456 R1_CellSelectModule48.2@3.732,13.905
NetK1_CellSelectModule48_4: K1_CellSelectModule48.4 R2.1 | length 1.3
  Top Layer w0.2: K1_CellSelectModule48.4@3.72,6.444 3.735,6.429 R2.1@3.735,5.111
NetR53_1: R53.1 U4.13 | length 1.9
  Top Layer w0.2: U4.13@45.189,28.624 R53.1@45.189,30.494
NetR54_1: R54.1 U4.5 | length 2
  Top Layer w0.2: R54.1@45.947,17.145 45.993,17.145 46.459,17.611 U4.5@46.459,18.874
NetU4_1: U4.1
NetU4_4: U4.4
NetU6_2: U6.2
NetU6_4: U6.4
NRST: C11.1 R51.2 SW1.3 SW1.4 U1.14 | length 30.3
  Top Layer w0.2: SW1.3@52.457,18.577 SW1.4@56.608,18.577 56.626,18.596 R51.2@58.162,18.596 ; R51.2@58.162,18.85 R51.2@58.166,18.854 ; R51.2@58.166,18.6 R51.2@58.166,18.854 ; C11.1@58.166,19.83 R51.2@58.166,18.854 ; v2@75.184,19.304 75.43,19.058 U1.14@75.43,17.907
  Bottom Layer w0.2: v2(58.168,19.253) 58.168,22.354 58.674,22.86 63.112,22.86 66.642,19.33 v2(75.208,19.33)
PA0: J1.1 U1.23 | length 5.4
  Top Layer w0.2: U1.23@79.93,17.907 79.94,17.897 79.94,17.07 80.27,16.74 82.017,16.74 82.231,16.526 82.231,16.522 83.329,15.424 83.329,15.003 J1.1@83.346,14.986
PA1: J2.1 U1.24 | length 6.3
  Top Layer w0.2: U1.24@80.43,17.907 80.44,17.917 80.44,18.744 80.797,19.101 81.361,19.101 J2.1@84.455,16.007
PA2: J3.1 U1.25 | length 4.8
  Top Layer w0.2: U1.25@80.93,17.907 81.488,17.907 82.208,17.187 82.211,17.187 82.685,16.714 82.685,16.71 J3.1@84.455,14.94
PA3: J4.1 U1.26 | length 3.1
  Top Layer w0.2: U1.26@82.465,19.422 82.465,19.007 J4.1@84.397,17.074
PB0: J16.1 U1.35 | length 3.4
  Top Layer w0.2: U1.35@82.455,23.932 85.304,23.932 85.614,23.622 J16.1@85.725,23.622
PB1: J17.1 U1.36 | length 4.7
  Top Layer w0.2: U1.36@82.455,24.432 86.202,24.432 J17.1@86.885,23.749
PB2: J18.1 U1.37 | length 4.5
  Top Layer w0.2: U1.37@82.455,24.932 86.844,24.932 J18.1@86.897,24.878
PC0: U1.15
PC1: U1.16
PC2: U1.17
PC3: U1.18
PC15: U1.9
PE7: J9.1 U1.38 | length 4.6
  Top Layer w0.2: U1.38@82.455,25.432 82.465,25.442 83.15,25.442 83.161,25.453 86.039,25.453 86.472,25.886 86.809,25.886 J9.1@86.868,25.946
PE8: J10.1 U1.39 | length 5.5
  Top Layer w0.2: U1.39@82.455,25.932 85.876,25.932 86.868,26.924 J10.1@86.868,27.559
PE9: J11.1 U1.40 | length 3.7
  Top Layer w0.2: U1.40@82.455,26.432 82.465,26.422 83.15,26.422 83.161,26.411 85.386,26.411 J11.1@85.801,26.826 J11.1@85.939,26.964
PE10: J12.1 U1.41 | length 5.1
  Top Layer w0.2: U1.41@82.455,26.932 82.465,26.942 83.15,26.942 83.161,26.953 83.303,26.953 83.327,26.976 85.018,26.976 86.578,28.536 86.591,28.536 86.757,28.702 J12.1@86.868,28.702
PE11: J13.1 U1.42 | length 2.4
  Top Layer w0.2: U1.42@82.455,27.432 84.531,27.432 J13.1@84.734,27.635
PH0: U1.12
PH2: U1.73
SCL: J20.1 R55.1 U1.92 U5.2 | length 12.7
  Top Layer w0.2: U5.2@59.249,29.274 59.724,29.274 60.399,28.599 60.778,28.599 60.929,28.448 62.543,28.448 62.797,28.194 J20.1@62.865,28.194 ; v2(64.643,23.273) 64.754,23.273 64.913,23.432 U1.92@67.405,23.432
  Bottom Layer w0.2: J20.1@62.872,28.314 62.872,28.298 63.14,28.03 63.156,28.03 64.721,26.465 64.721,23.351 v2(64.643,23.273)
SCL-MOSI: J26.1 P4.5 P4.6 U1.47 | length 80.1
  Top Layer w0.2: P4.5@25.4,18.161 P4.6@25.4,20.701 ; U1.47@82.455,29.932 82.465,29.922 84.124,29.922 85.266,28.78 85.52,28.78 J26.1@85.598,28.702
  Bottom Layer w0.2: P4.5@25.4,18.161 P4.6@25.4,20.701 ; P4.6@25.527,20.828 26.724,22.025 55.56,22.025 63.065,29.53 63.065,33.213 64.25,34.398 68.338,34.398 69.23,33.506 82.819,33.506 84.939,31.386 84.939,29.361 J26.1@85.598,28.702
SDA: J19.1 R57.1 U1.93 U5.3 | length 14.5
  Top Layer w0.2: U5.3@59.249,30.544 60.218,30.544 60.627,30.953 60.778,30.953 R57.1@60.903,31.078 61.505,31.078 J19.1@64.325,28.258 ; v2(65.367,22.773) 65.426,22.832 65.972,22.832 66.072,22.932 U1.93@67.405,22.932
  Bottom Layer w0.2: J19.1@64.325,28.258 65.37,27.213 65.37,22.776 v2(65.367,22.773)
SDA-MOSI: J22.1 P4.3 P4.4 U1.48 | length 83
  Top Layer w0.2: P4.3@22.86,18.161 P4.4@22.86,20.701 ; U1.48@82.455,30.432 82.465,30.422 84.434,30.422 85.009,29.848 85.52,29.848 J22.1@85.598,29.769
  Bottom Layer w0.2: P4.4@22.285,20.505 23.247,21.467 23.247,21.469 24.257,22.479 55.372,22.479 62.611,29.718 62.611,33.401 64.062,34.852 68.526,34.852 69.418,33.96 83.007,33.96 85.598,31.369 J22.1@85.598,29.769 ; P4.3@22.86,18.161 P4.4@22.86,20.701
SYS_JTCK-SWCLK: J31.1 U1.76 | length 3.1
  Top Layer w0.2: J31.1@65.645,33.274 65.724,33.196 65.991,33.196 66.445,32.742 66.445,31.707 66.71,31.442 67.395,31.442 U1.76@67.405,31.432
SYS_JTDI: J36.1 U1.77 | length 2.4
  Top Layer w0.2: J36.1@65.659,32.131 65.737,32.053 65.737,31.772 66.568,30.942 67.395,30.942 U1.77@67.405,30.932
SYS_JTDO-TRACESWO: J23.1 U1.89 | length 5
  Top Layer w0.2: J23.1@62.484,24.765 62.595,24.765 62.762,24.932 U1.89@67.405,24.932
SYS_JTMS-SWDIO: J28.1 U1.72 | length 8.6
  Top Layer w0.2: v2(70.358,31.496) 70.43,31.568 U1.72@70.43,32.957
  Bottom Layer w0.2: J28.1@64.516,33.274 65.175,33.933 67.921,33.933 v2(70.358,31.496)
SYS_JTRST: J40.1 U1.90 | length 3.8
  Top Layer w0.2: J40.1@63.662,24.257 63.844,24.439 U1.90@67.398,24.439
SYS_TraceCK: J25.1 U1.1 | length 3.4
  Top Layer w0.2: J25.1@65.844,17.197 68.22,17.197 U1.1@68.93,17.907
SYS_TraceD0: J29.1 U1.2 | length 4.9
  Top Layer w0.2: J29.1@65.786,16.129 66.4,16.743 69.094,16.743 69.409,17.059 69.409,17.201 69.42,17.212 69.42,17.897 U1.2@69.43,17.907
SYS_TraceD1: J33.1 U1.3 | length 5.7
  Top Layer w0.2: J33.1@66.421,15.062 66.421,15.875 66.802,16.256 69.248,16.256 69.92,16.928 69.92,17.897 U1.3@69.93,17.907
SYS_TraceD2: J37.1 U1.4 | length 4.3
  Top Layer w0.2: J37.1@67.764,15.494 69.129,15.494 70.43,16.795 U1.4@70.43,17.907
SYS_TraceD3: J41.1 U1.5 | length 5.6
  Top Layer w0.2: J41.1@67.531,14.365 67.599,14.434 68.71,14.434 70.93,16.653 U1.5@70.93,17.907
V+: J30.1 K1_CellSelectModule1.3 K1_CellSelectModule2.3 K1_CellSelectModule3.3 K1_CellSelectModule4.3 K1_CellSelectModule5.3 K1_CellSelectModule6.3 K1_CellSelectModule7.3 K1_CellSelectModule8.3 K1_CellSelectModule9.3 K1_CellSelectModule10.3 K1_CellSelectModule11.3 K1_CellSelectModule12.3 K1_CellSelectModule13.3 K1_CellSelectModule14.3 K1_CellSelectModule15.3 K1_CellSelectModule16.3 K1_CellSelectModule17.3 K1_CellSelectModule18.3 K1_CellSelectModule19.3 K1_CellSelectModule20.3 K1_CellSelectModule21.3 K1_CellSelectModule22.3 K1_CellSelectModule23.3 K1_CellSelectModule24.3 K1_CellSelectModule25.3 K1_CellSelectModule26.3 K1_CellSelectModule27.3 K1_CellSelectModule28.3 K1_CellSelectModule29.3 K1_CellSelectModule30.3 K1_CellSelectModule31.3 K1_CellSelectModule32.3 K1_CellSelectModule33.3 K1_CellSelectModule34.3 K1_CellSelectModule35.3 K1_CellSelectModule36.3 K1_CellSelectModule37.3 K1_CellSelectModule38.3 K1_CellSelectModule39.3 K1_CellSelectModule40.3 K1_CellSelectModule41.3 K1_CellSelectModule42.3 K1_CellSelectModule43.3 K1_CellSelectModule44.3 K1_CellSelectModule45.3 K1_CellSelectModule46.3 K1_CellSelectModule47.3 K1_CellSelectModule48.3 R50.2 U6.1 | length 346.5
  Top Layer w0.2: K1_CellSelectModule48.3@1.18,6.444 1.18,7.371 1.556,7.747 2.286,7.747 ; K1_CellSelectModule41.3@3.72,44.021 3.72,43.143 3.937,42.926 8.72,42.926 ; K1_CellSelectModule37.3@5.335,19.334 7.446,19.334 ; K1_CellSelectModule38.3@5.335,24.334 7.441,24.334 ; K1_CellSelectModule39.3@5.335,29.334 7.441,29.334 ; K1_CellSelectModule40.3@5.335,34.334 6.262,34.334 7.446,33.15 7.446,19.334 ; K1_CellSelectModule12.3@6.18,6.444 6.18,7.747 ; K1_CellSelectModule42.3@8.72,44.021 8.72,42.926 ; K1_CellSelectModule11.3@11.18,6.444 11.18,7.747 ; K1_CellSelectModule43.3@13.72,44.021 13.72,42.926 ; K1_CellSelectModule10.3@16.18,6.444 16.18,7.747 ; K1_CellSelectModule44.3@18.72,44.021 18.72,42.926 ; K1_CellSelectModule9.3@21.18,6.444 21.18,7.747 ; K1_CellSelectModule45.3@23.72,44.021 23.72,42.926 ; K1_CellSelectModule8.3@26.18,6.444 26.18,7.747 ; K1_CellSelectModule46.3@28.72,44.021 28.72,42.926 ; K1_CellSelectModule7.3@31.18,6.444 31.18,7.747 ; K1_CellSelectModule47.3@33.72,44.021 33.72,42.926 ; K1_CellSelectModule6.3@36.18,6.444 36.18,7.747 ; U6.1@36.76,28.194 39.074,28.194 39.13,28.138 39.202,28.138 J30.1@39.202,28.872 39.191,28.861 39.191,28.124 R50.2@39.18,28.113 ; K1_CellSelectModule25.3@38.72,44.021 38.72,42.926 ; K1_CellSelectModule5.3@41.18,6.444 41.18,7.747 ; K1_CellSelectModule26.3@43.72,44.021 43.72,42.926 ; K1_CellSelectModule4.3@46.18,6.444 46.18,7.747 ; K1_CellSelectModule27.3@48.72,44.021 48.72,42.926 ; K1_CellSelectModule3.3@51.18,6.444 51.18,7.747 ; K1_CellSelectModule28.3@53.72,44.021 53.72,42.926 ; K1_CellSelectModule2.3@56.18,6.444 56.18,7.747 ; K1_CellSelectModule29.3@58.72,44.021 58.72,42.926 ; K1_CellSelectModule1.3@61.18,6.444 61.18,7.747 ; K1_CellSelectModule30.3@63.72,44.021 63.72,42.926 ; K1_CellSelectModule23.3@66.18,6.444 66.18,7.747 ; K1_CellSelectModule31.3@68.72,44.021 68.72,42.926 ; K1_CellSelectModule22.3@71.18,6.444 71.18,7.747 ; K1_CellSelectModule32.3@73.72,44.021 73.72,42.926 ; K1_CellSelectModule21.3@76.18,6.444 76.18,7.747 ; K1_CellSelectModule33.3@78.72,44.021 78.72,42.926 ; K1_CellSelectModule20.3@81.18,6.444 81.18,7.747 ; K1_CellSelectModule34.3@83.72,44.021 83.72,42.926 ; K1_CellSelectModule19.3@86.18,6.444 86.18,7.747 ; K1_CellSelectModule35.3@88.72,44.021 88.72,42.926 ; K1_CellSelectModule18.3@91.18,6.444 91.18,7.747 ; K1_CellSelectModule36.3@93.72,44.021 93.72,42.926 ; K1_CellSelectModule15.3@94.667,21.755 93.218,21.755 ; K1_CellSelectModule14.3@94.667,26.755 93.218,26.755 ; K1_CellSelectModule13.3@94.667,31.755 93.218,31.755 ; K1_CellSelectModule17.3@96.18,6.444 96.18,7.747 ; 97.536,42.799 97.536,35.814 97.409,35.687 93.98,35.687 93.218,34.925 93.218,31.755 ; K1_CellSelectModule24.3@98.72,44.021 98.72,43.094 98.552,42.926 93.72,42.926 ; 2.286,7.747 2.286,14.478 2.921,15.113 6.477,15.113 7.446,16.082 7.446,19.334 ; 2.286,7.747 6.18,7.747 ; 6.18,7.747 11.18,7.747 ; 8.72,42.926 13.72,42.926 ; 11.18,7.747 16.18,7.747 ; 13.72,42.926 18.72,42.926 ; 16.18,7.747 21.18,7.747 ; 18.72,42.926 23.72,42.926 ; 21.18,7.747 26.18,7.747 ; 23.72,42.926 28.72,42.926 ; 26.18,7.747 31.18,7.747 ; 28.72,42.926 33.72,42.926 ; 31.18,7.747 36.18,7.747 ; 33.72,42.926 38.72,42.926 ; 36.18,7.747 41.18,7.747 ; 38.72,42.926 41.084,42.926 v2(41.148,42.862) 41.212,42.926 43.72,42.926 ; 41.18,7.747 46.18,7.747 ; 43.72,42.926 48.72,42.926 ; 46.18,7.747 51.18,7.747 ; 48.72,42.926 53.72,42.926 ; 51.18,7.747 56.18,7.747 ; 53.72,42.926 58.72,42.926 ; 56.18,7.747 61.18,7.747 ; 58.72,42.926 63.72,42.926 ; 61.18,7.747 66.18,7.747 ; 63.72,42.926 68.72,42.926 ; 66.18,7.747 71.18,7.747 ; 68.72,42.926 73.72,42.926 ; 71.18,7.747 76.18,7.747 ; 73.72,42.926 78.72,42.926 ; 76.18,7.747 81.18,7.747 ; 78.72,42.926 83.72,42.926 ; 81.18,7.747 86.18,7.747 ; 83.72,42.926 88.72,42.926 ; 86.18,7.747 91.18,7.747 ; 88.72,42.926 93.72,42.926 ; 91.18,7.747 96.18,7.747 ; 93.218,21.755 93.218,17.406 93.869,16.755 98.307,16.755 99.568,15.494 99.568,8.509 98.806,7.747 96.18,7.747 ; 93.218,21.755 93.218,26.755 ; 93.218,26.755 93.218,31.755
  Bottom Layer w0.2: J30.1@39.202,28.872 39.982,29.652 40.447,29.652 41.148,30.353 v2(41.148,42.862)
Vref: C13.1 C14.1 J32.1 U1.21 | length 4.6
  Top Layer w0.2: U1.21@78.93,17.907 78.936,17.9 78.936,16.292 C13.1@78.943,16.285 78.943,15.109 C14.1@78.962,15.09 79.218,14.834 79.386,14.834 J32.1@80.264,13.956
pads on no net: U1.6 U2.1 U2.5 U2.8 U3.1

## Polygon pours and split planes (outlines as drawn)
ISO_GND on Top Layer "ISO_GND_L01_P000" (solid, remove dead copper, pour order 0): 55.118,25.654 55.88,26.416 55.88,33.02 50.262,33.02 48.891,34.29 17.278,34.29 17.278,25.654
GND on Top Layer "GND_L01_P002" (solid, remove dead copper, pour order 2): 0,50.165 0.127,50.038 99.949,50.038 99.949,0 0,0
GND on Bottom Layer "GND_L02_P001" (solid, remove dead copper, pour order 1): 0,50.165 0.127,50.038 99.949,50.038 99.949,0 0,0

## Silkscreen, mask and mechanical layers (free items; w line width, h text height)
Mechanical 1:
  lines w0.254: 15.367,34.29 15.367,26.289 ccw(c16.637,26.289) 16.637,25.019 39.37,25.019 ccw(c39.37,25.4) 39.751,25.4 ccw(c39.37,25.4) 39.37,25.781 17.399,25.781 cw(c17.399,27.051) 16.129,27.051 16.129,33.655 cw(c17.399,33.655) 17.399,34.925 39.243,34.925 ccw(c39.243,35.306) 39.624,35.306 ccw(c39.243,35.306) 39.243,35.687 16.637,35.687 ccw(c16.637,34.417) 15.367,34.417 ; 0,0 100,0 100,50 0,50 0,0